# EAGLE board esp8266_breakout_single (EAGLE 7.5.0)
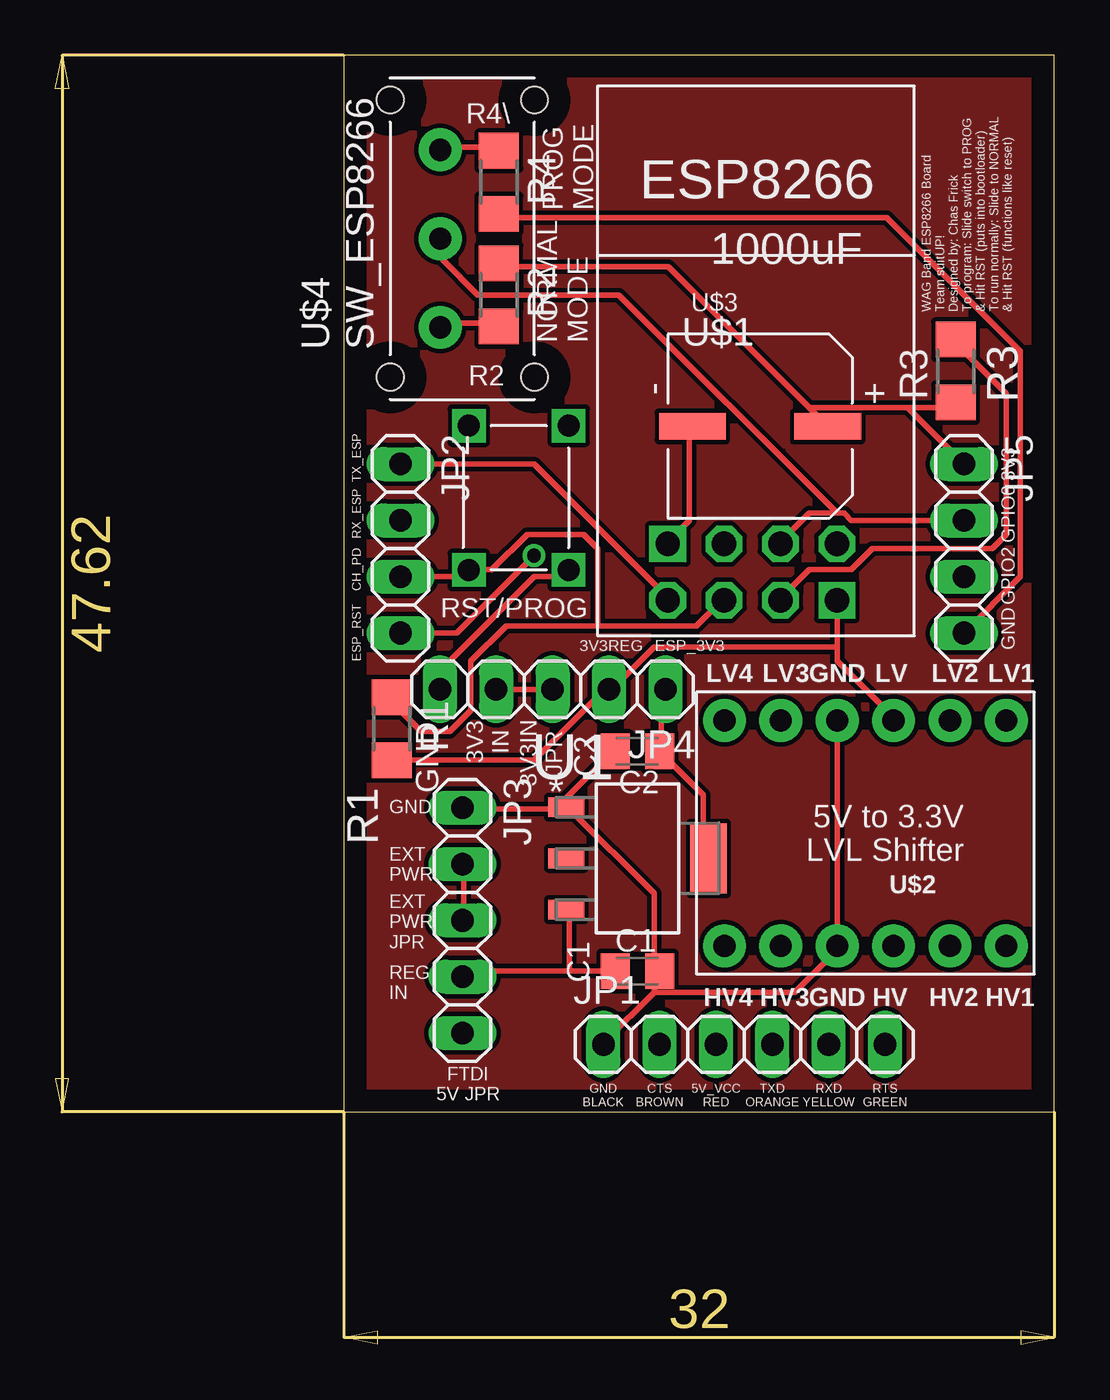
[diagram p0: board, top side]
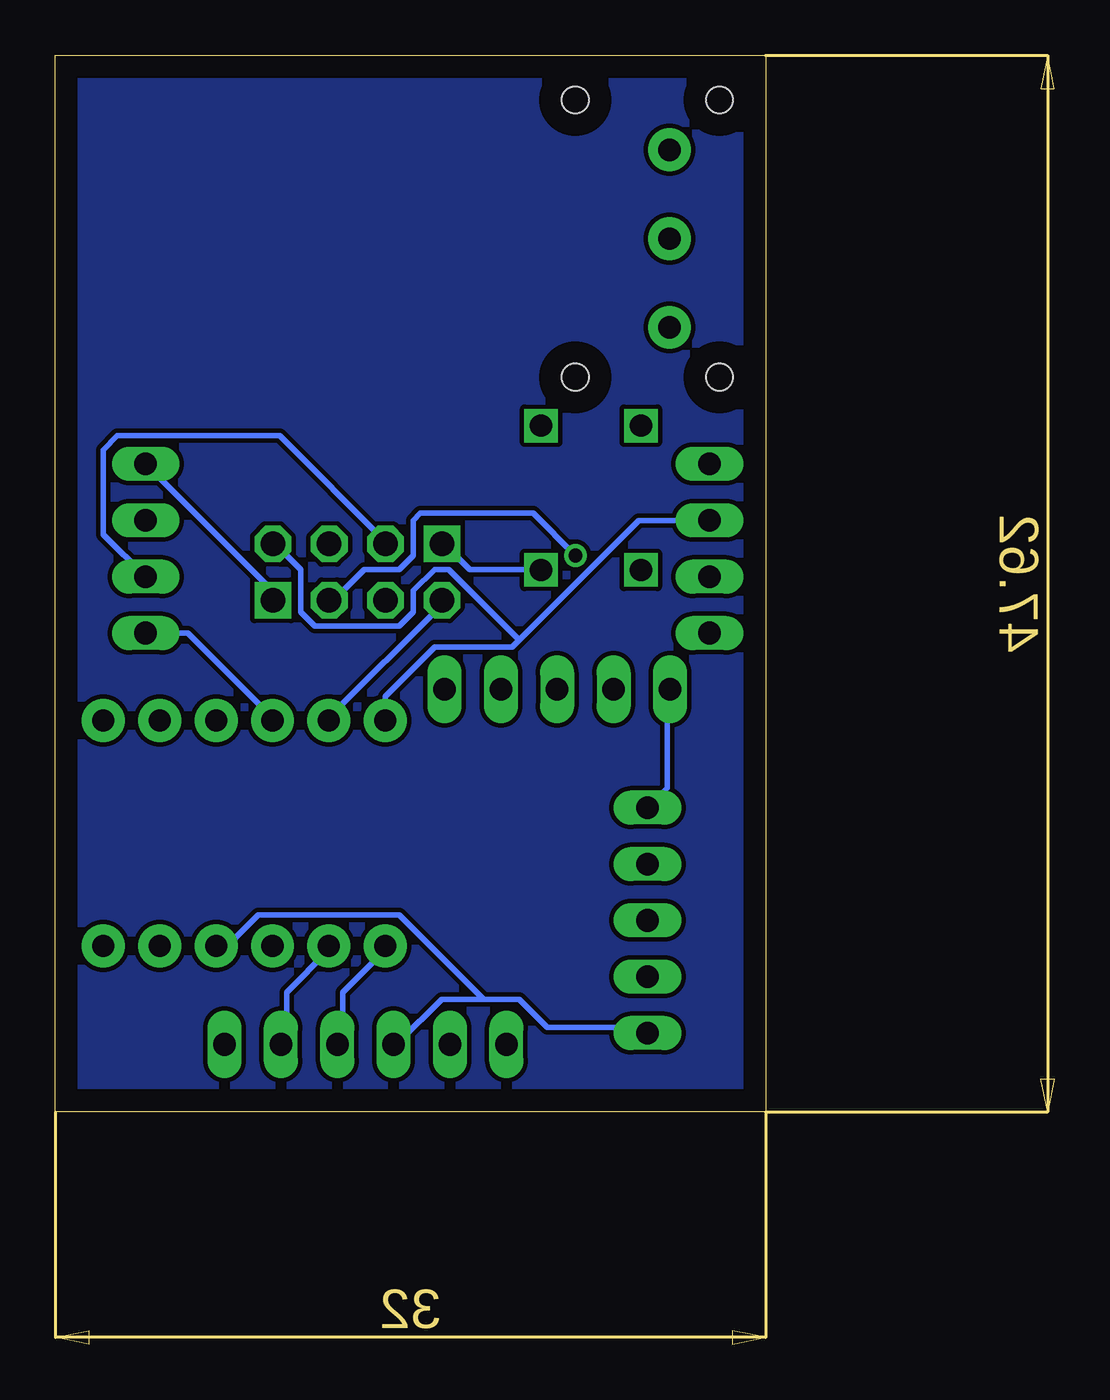
[diagram p1: board, bottom side, seen from below]

Size 32 x 47.62 mm. Coordinates in mm from the lower left corner, seen from the top.
Outline: 0,0 32,0 32,47.62 0,47.62 0,0
Copper layers (1*16): Top 0.035mm / dielectric 1.5mm / Bottom 0.035mm
Design rules "default": minimum track width 10mil, minimum drill 24mil, track to track 8mil, track to pad 8mil, pad to pad 8mil, via to via 8mil, smd to smd 8mil, copper to edge 40mil, drill to drill 8mil, minimum pad ring 10mil, minimum via ring 8mil, stop-mask expansion 4mil, vias tented up to drill 0mil, thermal gap 10mil

## Footprints (pad centres in the part's own frame; a part is rotated, then mirrored left to right if it is on the bottom)
C0805K = smd 1.3 x 1.6: 1 -1,0; 2 1,0
FTDI_5V_SPARKFUN = drill 1.016 long: CTS/BROWN -3.81,0; GND/BLACK -6.35,0; RTS/GREEN 6.35,0; RXD/YELLOW 3.81,0; TXD/ORANGE 1.27,0; VCC/RED -1.27,0
1X04 = drill 1.016 long: 1 -3.81,0; 2 -1.27,0; 3 1.27,0; 4 3.81,0
1X05 = drill 1.016 long: 1 -5.08,0; 2 -2.54,0; 3 0,0; 4 2.54,0; 5 5.08,0
R1206 = smd 1.6 x 1.803: 1 -1.422,0; 2 1.422,0
TACT = drill 1 square: P$1 -3.25,2.25; P$2 3.25,2.25; P$3 -3.25,-2.25; P$4 3.25,-2.25
SOT230P700X180-4N = smd 1.626 x 0.889: 1 -3.2,2.311; 2 -3.2,0; 3 -3.2,-2.311 | smd 1.626 x 3.175: 4 3.2,0
ESP01 = drill 1.1 octagon: CH_PD -1.285,-8.178; GPIO0 1.255,-5.638; GPIO2 -1.285,-5.638; RST 1.255,-8.178; RX 3.795,-5.638; TX -3.825,-8.178 | drill 1.1 square: GND -3.825,-5.638; VCC 3.795,-8.178
LVLSFT_PAC = drill 1 pad 1.93: P$1 -6.35,-5.08; P$2 -3.81,-5.08; P$3 -1.27,-5.08; P$4 1.27,-5.08; P$5 3.81,-5.08; P$6 6.35,-5.08; P$7 6.35,5.08; P$8 3.81,5.08; P$9 1.27,5.08; P$10 -1.27,5.08; P$11 -3.81,5.08; P$12 -6.35,5.08
TZV1000M = smd 1.2 x 3: + 0,3.05; - 0,-3.05
SW_PCB_ESP = drill 1 pad 1.93: P$1 4,1; P$2 0,1; P$3 -4,1 | hole 1.2: -6.25,3.25; -6.25,-3.25; 6.25,-3.25; 6.25,3.25

## Placement (x,y rotation side)
C1  [C0805K]  13.22,6.35 0 top
C2  [C0805K]  13.22,16.26 180 top
JP1  [FTDI_5V_SPARKFUN]  18.03,3.05 0 top
JP2  [1X04]  2.54,25.4 270 top
JP3  EXT_PWR_JMP  [1X05]  5.33,8.64 270 top
JP4  3V3_PWR_OUT  [1X05]  9.4,19.05 180 top
JP5  [1X04]  27.94,25.4 270 top
R1  10k  [R1206]  2.16,17.27 270 top
R2  10k  [R1206]  6.99,36.83 270 top
R3  10k  [R1206]  27.56,33.4 90 top
R4  10k  [R1206]  6.99,41.91 270 top
RST/PROG_MODE  TACT_SWITCH  [TACT]  7.87,27.69 270 top
U1  TLV1117-33CDCY  [SOT230P700X180-4N]  13.22,11.43 0 top
U$1  ESP01  [ESP01]  18.41,31.24 0 top
U$2  LVLSHIFTER  [LVLSFT_PAC]  23.5,12.57 180 top
U$3  TZVCAP  [TZV1000M]  18.75,30.91 270 top
U$4  SW_ESP8266  [SW_PCB_ESP]  5.33,39.37 90 top

## Library data of the parts
C1 C2 = rcl
JP1 RST/PROG_MODE U$1-U$4 = mqp_custom_parts
JP2-JP5 = pinhead
R1-R4 = resistor
U1 = Texas Instruments_By_element14_Batch_1; MPN: TLV1117-33CDCY; OC_FARNELL: 1494942; OC_NEWARK: 67K8520; PACKAGE: SOT-223-3; SUPPLIER: TEXAS INSTRUMENTS

## Nets
3V3_EXT_IN: JP4.3 JP4.4
+3V3: JP4.2 JP5.1 R1.2 R2.1 R3.1 U$1.VCC U$2.P$3 U$3.+
CH_PD: JP2.3 R1.1 RST/PROG_MODE.P$4 U$1.CH_PD
CTS_IN: JP1.CTS/BROWN
ESP_RST: JP2.4 R3.2 U$1.RST
EXT_PWR_IN: JP3.2 JP3.3
GND: C1.2 C2.2 JP1.GND/BLACK JP3.1 JP4.5 JP5.4 R4.2 RST/PROG_MODE.P$2 U1.1 U$1.GND U$2.P$4 U$2.P$9 U$3.-
GPIO0: JP5.2 U$1.GPIO0 U$4.P$2
GPIO2: JP5.3 U$1.GPIO2
N$1: C2.1 JP4.1 U1.4
N$2: C1.1 JP3.4 U1.3
N$4: R2.2 U$4.P$3
N$6: R4.1 U$4.P$1
RTS_IN: JP1.RTS/GREEN
RXD_ESP: JP2.2 U$1.RX U$2.P$6
RXD_IN: JP1.RXD/YELLOW U$2.P$8
TXD_ESP: JP2.1 U$1.TX U$2.P$5
TXD_IN: JP1.TXD/ORANGE U$2.P$7
VCC_5V_FTDI: JP1.VCC/RED JP3.5 U$2.P$10

## Tracks (layer width: path | path; a pad name or v marks a point on that pad's centre or on a via)
3V3_EXT_IN
  Top 0.254: JP4.3 JP4.4
+3V3
  Top 0.254: 20.95,31.75 21.59,31.11 U$3.+ | 20.95,31.75 14.61,38.1 6.99,38.1 R2.1 | 20.95,31.75 25.4,31.75 | 25.4,31.75 27.3,31.75 R3.1 | 25.4,31.75 JP5.1 | 22.23,20.95 22.23,20.32 24.77,17.78 U$2.P$3 | 22.23,20.95 22.23,22.86 U$1.VCC | R1.2 2.22,15.88 8.57,15.88 11.75,19.05 JP4.2 12.06,19.05 13.97,20.95 22.23,20.95
  Bottom 0.254: JP5.1 21.91,23.18 U$1.VCC
CH_PD
  Top 0.254: JP2.3 5.4,24.13 RST/PROG_MODE.P$4 5.71,24.45 6.67,24.45 8.26,26.04 10.79,26.04 11.43,25.4 11.43,21.91 | 11.43,21.91 15.88,21.91 16.83,22.86 U$1.CH_PD | 11.43,21.91 7.3,21.91 5.71,20.32 5.71,18.1 4.76,17.14 3.49,17.14 2.22,18.41 R1.1
ESP_RST  (via drill 0.61)
  Top 0.254: R3.2 27.62,34.61 29.84,32.38 29.84,26.04 29.21,25.4 23.81,25.4 22.86,24.45 20.95,24.45 19.68,23.18 U$1.RST | JP2.4 5.08,21.59 v8.57,25.08
  Bottom 0.254: v8.57,25.08 10.48,26.99 15.56,26.99 15.88,26.67 15.88,25.08 16.51,24.45 18.1,24.45 19.37,23.18 U$1.RST
EXT_PWR_IN
  Top 0.254: JP3.3 5.4,8.89 5.4,11.11 JP3.2
GND
  Top 0.254: JP5.4 30.48,24.13 30.48,34.29 24.45,40.32 6.99,40.32 R4.2 | 13.97,5.4 13.97,6.35 | 13.97,5.4 11.75,3.17 JP1.GND/BLACK | U$2.P$4 U$2.P$9 22.23,7.3 20.32,5.4 13.97,5.4 | U$3.- 15.56,30.8 15.56,26.67 14.61,25.72 U$1.GND | C2.2 12.06,16.19 9.84,13.97 U1.1 | JP3.1 5.4,13.65 9.84,13.65 U1.1 | RST/PROG_MODE.P$2 9.84,24.13 8.57,24.13 4.45,20 4.45,19.05 JP4.5 | 13.97,6.35 13.97,9.84 10.16,13.65 U1.1 | 13.97,6.35 C1.2
  Bottom 0.254: RST/PROG_MODE.P$2 10.16,24.45 13.34,24.45 14.29,25.4 U$1.GND | JP3.1 4.45,14.61 4.45,19.05 JP4.5 | JP5.4 26.04,21.59 22.23,17.78 U$2.P$4
GPIO0
  Top 0.254: JP5.2 22.86,26.67 22.54,26.99 22.23,26.99 | 22.23,26.99 20.95,26.99 19.68,25.72 U$1.GPIO0 | 22.23,26.99 12.38,36.83 6.03,36.83 4.45,38.42 4.45,39.37 U$4.P$2
GPIO2
  Bottom 0.254: JP5.3 29.84,26.04 29.84,29.84 29.21,30.48 21.91,30.48 17.14,25.72 U$1.GPIO2
N$1
  Top 0.254: JP4.1 14.29,19.05 14.29,16.51 C2.1 16.19,14.29 16.19,11.43 U1.4
N$2
  Top 0.254: 10.16,6.35 5.4,6.35 JP3.4 | 10.16,6.35 C1.1 | 10.16,6.35 10.16,8.89 U1.3
N$4
  Top 0.254: R2.2 6.99,35.56 4.45,35.56 U$4.P$3
N$6
  Top 0.254: R4.1 6.99,43.5 4.45,43.5 U$4.P$1
RXD_ESP
  Bottom 0.254: JP2.2 5.71,26.67 11.11,21.27 | 11.11,21.27 11.43,20.95 14.92,20.95 17.14,18.73 U$2.P$6 | 11.11,21.27 14.29,24.45 14.92,24.45 15.88,23.5 15.88,22.54 16.51,21.91 20.32,21.91 20.95,22.54 20.95,24.45 21.91,25.4 U$1.RX
RXD_IN
  Bottom 0.254: JP1.RXD/YELLOW 21.59,3.17 21.59,5.4 19.68,7.3 U$2.P$8
S$1
  pour Bottom: 0,0 0,47.62 32,47.62 32,0
S$2
  pour Top: 0,0 0,47.62 32,47.62 32,0
TXD_ESP
  Top 0.254: JP2.1 8.57,29.21 14.61,23.18 U$1.TX
  Bottom 0.254: U$2.P$5 19.68,17.78 14.61,22.86 U$1.TX
TXD_IN
  Bottom 0.254: JP1.TXD/ORANGE 19.05,3.17 19.05,5.4 17.14,7.3 U$2.P$7
VCC_5V_FTDI
  Bottom 0.254: 12.7,5.08 14.61,5.08 16.51,3.17 JP1.VCC/RED | 12.7,5.08 11.11,5.08 9.84,3.81 5.4,3.81 JP3.5 | 12.7,5.08 16.51,8.89 22.86,8.89 24.13,7.62 24.77,7.62 U$2.P$10

## Text on the board
tPlace: R4\ | PROG / MODE | 1000uF | WAG Band ESP8266 Board / Team suitUP! / Designed by: Chas Frick / To program: Slide switch to PROG / & Hit RST (puts into bootloader) / To run normally: Slide to NORMAL / & Hit RST (functions like reset) | NORMAL / MODE | R2 | R3 | TX_ESP | 3V3 | RX_ESP | GPIO0 | CH_PD | RST/PROG | GPIO2 | 3V3REG | ESP_3V3 | GND | ESP_RST | GND | 3V3 / IN | 3V3IN / JPR | C2 | GND | R1 | EXT / PWR | EXT / PWR / JPR | C1 | REG / IN | FTDI / 5V JPR | GND / BLACK | CTS / BROWN | 5V_VCC / RED | TXD / ORANGE | RXD / YELLOW | RTS / GREEN